# Altium PCB regulated_power_supply_board.PcbDoc
Units mm, origin at the board's own origin, x right, y up, seen from the top; angles counter-clockwise.
Board outline 80 x 50 mm, 2 copper layers (Top Layer, Bottom Layer), stack 1.67 mm thick; 41 components, 23 nets, 135 pads, 0 vias.
Unrouted connection lines stored in the file: 74.
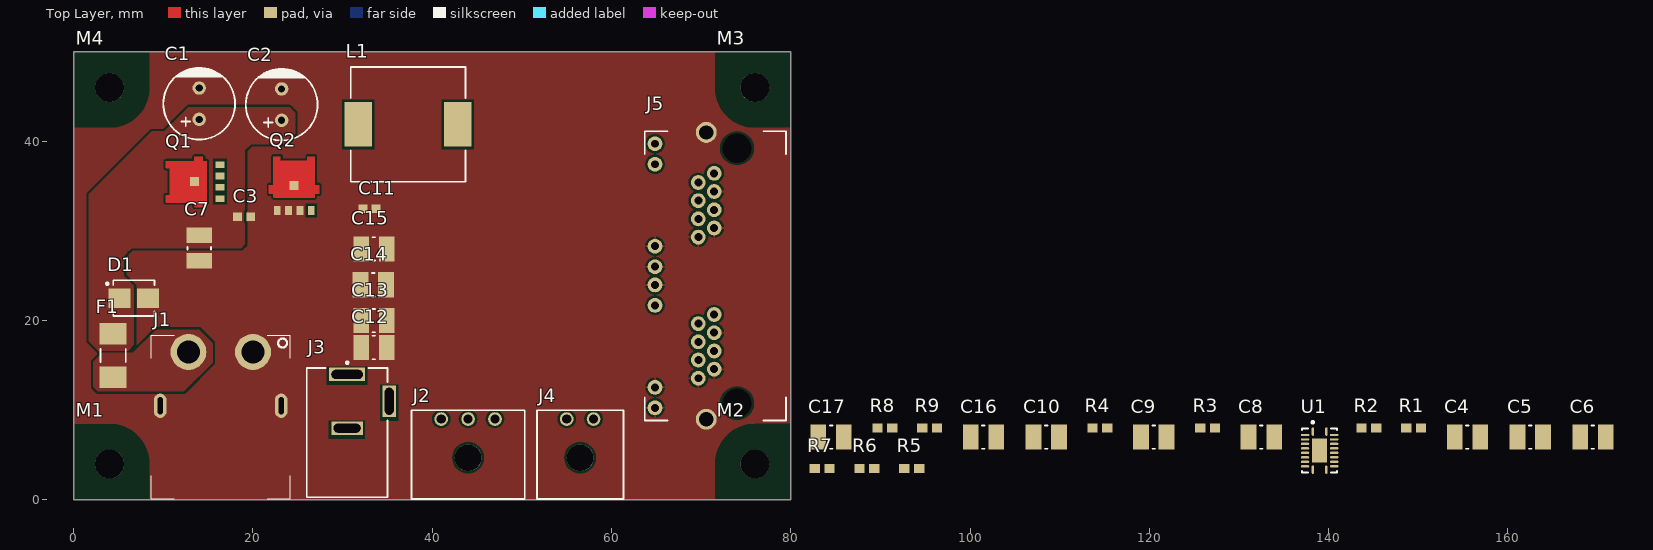
[diagram p0: Top Layer view]
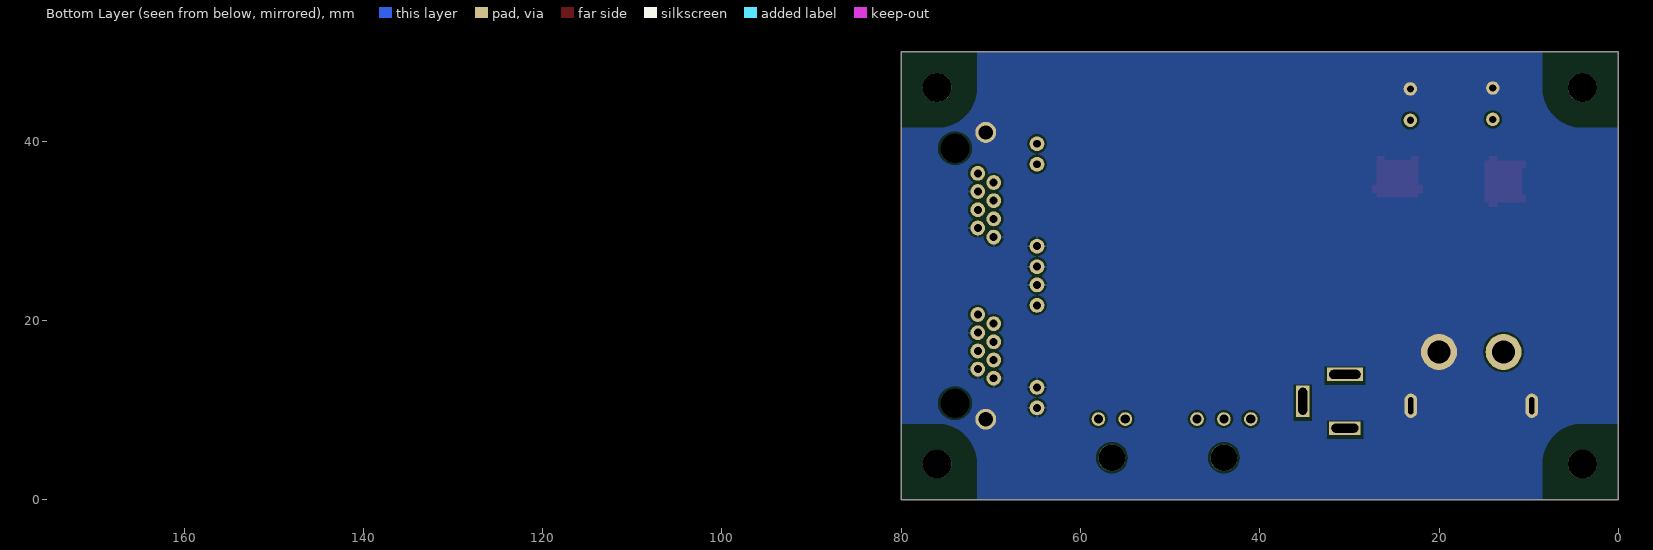
[diagram p1: Bottom Layer view, seen from below]

## Layer stack, top to bottom
Top Solder: solder mask 0.0102, Solder Resist, Dk 3.5
Top Layer: signal copper 0.035
Dielectric 1: dielectric 1.6, FR-4, Dk 4.8
Bottom Layer: signal copper 0.035
Bottom Solder: solder mask 0.0102, Solder Resist, Dk 3.5

## Board outline
0,0 80,0 80,50 0,50

## Design rules (kind name [scope] priority, off if disabled: settings)
Clearance [All] p1: gap=0.254 ignorepadtopadclearanceinfootprint=FALSE except(0: Arc-Hole Track-Hole SMDPad-Hole THPad-Hole Via-Hole Fill-Hole Poly-Hole Region-Hole Text-Hole)
PolygonConnect PolygonConnect_Power [InNetClass('Power')] p1: connectstyle=Direct reliefconductorwidth=0.254 reliefentries=4 polygonreliefangle="90 Angle" airgapwidth=0.254
PolygonConnect PolygonConnect_General [All] p2: connectstyle=Relief reliefconductorwidth=0.254 reliefentries=4 polygonreliefangle="90 Angle" airgapwidth=0.254
RoomDefinition regulated_power_supply_board [InComponentClass('regulated_power_supply_board')] p1 off: confinementstyle=ConfineIn formatcopy=TRUE lockcomponents=FALSE outline 81,2 99.5,2 99.5,13.5 81,13.5
RoutingVias [All] p1: holewidth=0.711 width=1.27 viastyle="Through Hole" minholewidth=0.711 minwidth=1.27 maxholewidth=0.711 maxwidth=1.27
SolderMaskExpansion [All] p1: expansion=0.102 istentingtop=FALSE
Width [All] p1: maxlimit=0.254 minlimit=0.254 preferedwidth=0.254
30 further rules are at their usual default settings.

## Classes and differential pairs
net class Power: PGND SW VIN VIN_UNFUSED VOUT_12
component class regulated_power_supply_board: C1 C2 C3 C4 C5 C6 C7 C8 C9 C10 C12 C13 C14 C15 C16 C17 D1 F1 J1 J4 J5 L1 M1 M2 M3 M4 Q1 Q2 R1 R2 R3 R4 R5 R6 R7 R8 U1

## Components (designator, comment, footprint, x,y, rotation, side; value= is the part's Value field where it differs from the comment)
C1 "100uF" CPOL_8x11_5_THRU 14,44.2 r90 top
C2 "100uF" CPOL_8x11_5_THRU 23.2,44.1 r90 top
C3 "=Partnumber" CAPC1608X09N 19,31.6 r0 top
C4 "=Partnumber" "C1210 (3225M)" 155.5,7 r0 top
C5 "=Partnumber" "C1210 (3225M)" 162.5,7 r0 top
C6 "=Partnumber" "C1210 (3225M)" 169.5,7 r0 top
C7 "=Partnumber" "C1210 (3225M)" 14,28.1 r90 top
C8 "=Partnumber" "C1210 (3225M)" 132.5,7 r0 top
C9 "=Partnumber" "C1210 (3225M)" 120.5,7 r0 top
C10 "=Partnumber" "C1210 (3225M)" 108.5,7 r0 top
C11 "=Partnumber" CAPC1608X09N 33,32.5 r180 top
C12 "=Partnumber" "C1210 (3225M)" 33.5,17 r0 top
C13 "=Partnumber" "C1210 (3225M)" 33.5,20 r0 top
C14 "=Partnumber" "C1210 (3225M)" 33.425,24 r0 top
C15 "=Partnumber" "C1210 (3225M)" 33.5,28 r0 top
C16 "=Partnumber" "C1210 (3225M)" 101.5,7 r0 top
C17 "=Partnumber" "C1210 (3225M)" 84.5,7 r0 top
D1 "=Partnumber" SMB 6.7,22.5 r0 top
F1 "=Partnumber" Littelfuse_157 4.4,16.1 r90 top
J1 "XT60PW-M" XT60PW-M 16.4,10.5 r180 top
J2 "=Partnumber" 43650-030X 44,4.7 r0 top
J3 "PJ-002A" CUI-PJ-002A_V 30.5,11 r270 top
J4 "=Partnumber" 43650-020X 56.5,4.7 r0 top
J5 "RJHSE-X381-02" RJHSE-X38X-02 74,25 r90 top locked
L1 "100uH" SRP1265A 37.3,41.9 r0 top
M1 "Component_1" MOUNT_HOLE_3.2 0,0 r0 top
M2 "Component_1" MOUNT_HOLE_3.2 80,0 r90 top
M3 "Component_1" MOUNT_HOLE_3.2 80,50 r180 top
M4 "Component_1" MOUNT_HOLE_3.2 0,50 r270 top
Q1 "MOSFET-N" "DFN-5 (SO-8FL)" 13.5,35.5 r90 top
Q2 "MOSFET-N" "DFN-5 (SO-8FL)" 24.6,35.1 r0 top
R1 "=Partnumber" CR0603 149.5,8 r0 top
R2 "=Partnumber" CR0603 144.5,8 r0 top
R3 "=Partnumber" CR0603 126.5,8 r0 top
R4 "=Partnumber" CR0603 114.5,8 r0 top
R5 "=Partnumber" CR0603 93.5,3.5 r0 top
R6 "=Partnumber" CR0603 88.5,3.5 r0 top
R7 "=Partnumber" CR0603 83.5,3.5 r0 top
R8 "=Partnumber" CR0603 90.5,8 r0 top
R9 "=Partnumber" CR0603 95.5,8 r0 top
U1 "=Partnumber" RGY0020B_TI_N 139,5.5 r0 top

## Footprints (in the part's own frame and the unit in brackets; to place one, negate y for a bottom-side part, rotate by r counter-clockwise, add the part's x,y. Pads: shape width x height; smd on the part's side, far side on the other; paste and mask are expansions set on the pad)
43650-020X [mm] "Molex Micro-Fit 3.0, 2POS, R/A w/Pegs, Single row"
  round 1.524 hole 1.02: 1(1.5,4.32) 2(-1.5,4.32)
  round 3 hole 3 unplated paste+0 mask+0: 3(0,0)
  silkscreen extent -4.82,-4.6 4.82,5.3, body extent -4.83,-4.6 4.83,5.3, height 5.57
43650-030X [mm] "Molex Micro-Fit 3.0, 2POS, R/A w/Pegs, Single row"
  round 1.524 hole 1.02: 1(3,4.32) 2(0,4.32) 3(-3,4.32)
  round 3 hole 3 unplated paste+0 mask+0: 4(0,0)
  silkscreen extent -6.32,-4.6 6.32,5.3, body extent -6.32,-4.6 6.33,5.3, height 5.57
"C1210 (3225M)" [mm] "Taiyo-Yuden SMD MLCC, Body 3.20x2.50mm, IPC Low Density"
  rect 1.75x2.8 smd: 1(-1.425,0) 2(1.425,0)
  silkscreen extent -0.15,-1.3 0.15,1.3, body extent -1.75,-1.35 1.75,1.35, height 2.7
CAPC1608X09N [mm] "Chip Capacitor, 2-Leads, Body 1.60x0.80mm, IPC Medium Density"
  rect 1x0.95 smd: 1(-0.75,0) 2(0.75,0)
  body extent -0.85,-0.45 0.85,0.45, height 0.9
CPOL_8x11_5_THRU [mm] "Capacitor with polarity, Radial lead, D=5mm, H=11mm, Pitch 5mm, Through-hole"
  round 1.5 hole 0.8: 1(-1.75,0) 2(1.75,0)
  silkscreen extent -4,-4 4,4, body extent -4,-4 4.01,4, height 13.01
CR0603 [mm] "Bourns Chip Resistor, CR Series, 2-Leads, Body 1.60x0.80mm, IPC Low Density"
  rect 1.15x1 smd: 1(-0.825,0) 2(0.825,0)
  body extent -0.85,-0.45 0.85,0.45, height 0.55
CUI-PJ-002A_V [mm] "THD, 3-Leads, Body 14.4x9mm, Height 11mm"
  rect 1.5x4 hole 1 slot 3.5 at 90 deg: 1(-3,0)
  rect 1.5x3.5 hole 1 slot 3 at 90 deg: 2(3,0)
  rect 3.5x1.5 hole 1 slot 3 at 0 deg: 3(0,4.7)
  silkscreen extent -4.42,-4.5 10.7,4.5, body extent -3.7,-4.5 10.7,4.9, height 11
"DFN-5 (SO-8FL)" [mm]
  rect 1x1 smd paste+0 mask+0: D(0,0)
  rect 0.75x1 smd: G(1.905,-2.795) S(-1.905,-2.795) S(-0.635,-2.795) S(0.635,-2.795)
  Top Layer region: -2.286,-1.33 -2.286,-0.905 -2.775,-0.905 -2.775,0 -2.28,0 -2.28,3.2 -1.53,3.2 -1.53,2.725 1.53,2.725 1.53,3.2 2.28,3.2 2.28,0 2.775,0 2.775,-0.905 2.28,-0.905 2.28,-1.33
  Top Layer lines w0: -2.28,3.2 -2.28,0 -2.775,0 -2.775,-0.905 -2.286,-0.905 -2.286,-1.33 2.28,-1.33 2.28,-0.905 2.775,-0.905 2.775,0 2.28,0 2.28,3.2 1.53,3.2 1.53,2.725 -1.53,2.725 -1.53,3.2 -2.28,3.2
  body extent -2.57,-3.07 2.58,3.08, height 1
Littelfuse_157 [mm] "Surface ount Fuse Assy, 2-Leads, Body 6.10x2.69mm, IPC Medium Density"
  rect 2.4x3 smd: 1(-2.43,0) 2(2.43,0)
  silkscreen extent -0.75,-1.4 0.75,1.4, body extent -3.35,-1.93 3.35,1.93, height 4
MOUNT_HOLE_3.2 [mm] "mouting hole for corners, D=3.20mm"
  round 3.2 hole 3.2 paste+0 mask+0: 1(4,4)
  Top Layer pour cut-out: 0,0 0,8.5 4,8.5 5.722,8.157 7.182,7.182 8.157,5.722 8.5,4 8.5,4 8.5,0
  Top Layer pour cut-out: 0,0
  Bottom Layer pour cut-out: 0,0 0,8.5 4,8.5 6.25,7.897 7.897,6.25 8.5,4 8.5,4 8.5,0
  body extent 1.25,1.25 6.75,6.75, height 3
RGY0020B_TI_N [mm] "QFN, 20-Leads, Body 3.50x4.50mm, Pitch 1.50mm/0.50mm, Thermal Pad 1.70x2.70mm, IPC Medium Density"
  oval 0.25x0.95 smd: 1(-0.75,2.125) 10(-0.75,-2.125) 11(0.75,-2.125) 20(0.75,2.125)
  oval 0.95x0.25 smd: 2(-1.625,1.75) 3(-1.625,1.25) 4(-1.625,0.75) 5(-1.625,0.25) 6(-1.625,-0.25) 7(-1.625,-0.75) 8(-1.625,-1.25) 9(-1.625,-1.75) 12(1.625,-1.75) 13(1.625,-1.25) 14(1.625,-0.75) 15(1.625,-0.25) 16(1.625,0.25) 17(1.625,0.75) 18(1.625,1.25) 19(1.625,1.75)
  rect 1.7x2.7 smd: 21(0,0)
  silkscreen extent -1.95,-2.45 1.95,3.27, body extent -1.8,-2.3 1.8,2.3, height 1
RJHSE-X38X-02 [mil]
  round 65 hole 35: 1-1(450,100) 1-2(410,170) 1-3(370,100) 1-4(330,170) 1-5(290,100) 1-6(250,170) 1-7(210,100) 1-8(170,170) 1-9(580,360) 1-10(490,360) 1-11(130,360) 1-12(40,360) 2-1(-170,100) 2-2(-210,170) 2-3(-250,100) 2-4(-290,170) 2-5(-330,100) 2-6(-370,170) 2-7(-410,100) 2-8(-450,170) 2-9(-40,360) 2-10(-130,360) 2-11(-490,360) 2-12(-580,360)
  round 60 hole 128 unplated: *(-560,0) *(560,0)
  round 92 hole 62: S1(630,135) S2(-630,135)
  silkscreen extent -635,-215 635,405, body extent -698,-231 698,404, height 593
SMB [mm] "Molded Diode, 2-Leads, Body 4.31x3.62mm, IPC Medium Density"
  rect 2.45x2.15 smd: 1(-1.575,0) 2(1.575,0)
  silkscreen extent -3.07,-2 2.3,2, body extent -2.5,-1.97 2.5,1.97, height 2.5
SRP1265A [mm] "Molded Inductor, 2-Leads, Body 12.50x12.50mm, IPC Medium Density"
  rect 3.1x5 smd: 1(-5.55,0) 2(5.55,0)
  silkscreen extent -6.4,-6.4 6.4,6.4, body extent -6.74,-6.3 6.74,6.3, height 6.31
XT60PW-M [mm] "XT60, 2 pins, Male, PCB mount, TH, R/A"
  round 4 hole 2.6: N(-3.6,-6) P(3.6,-6)
  oval 1.4x2.7 hole 1.9 slot 0.6 at 0 deg: T1(6.75,0) T2(-6.75,0)
  silkscreen extent -7.75,-7.85 7.75,10.35, body extent -7.75,-7.85 7.75,10.35, height 8.4

## Part data
C1 C2: library part CPOL
C3 C4 C5 C6 C7 C8 C9 C10 C11 C16 C17: library part C
C12 C13 C14 C15: library part C, "Ceramic capacitor 1210 X7R 50V 4.7uF", Capacitance=4.7uF, Case Code (Imperial)=1210, Case Code (Metric)=3225, Dielectric=X7R, Manufacturer="Taiyo Yuden", Manufacturer Part Number=UMK325B7475MM-T, Max Operating Temperature=125°C, Min Operating Temperature=-55°C, Package Quantity=500, Tolerance=20%, Voltage=50V, Case/Package=1210, Category="Ceramic Capacitors", ComponentLink1Description=https://datasheet.ciiva.com/2990/umk325b7475mm-t-ss-2990073.pdf?src-supplier=Avnet, ComponentLink1URL=https://datasheet.ciiva.com/2990/umk325b7475mm-t-ss-2990073.pdf?src-supplier=Avnet, ComponentLink2Description=https://datasheet.ciiva.com/141/umk325b7475mm-t-ss-141867.pdf?src-supplier=Digi-Key, ComponentLink2URL=https://datasheet.ciiva.com/141/umk325b7475mm-t-ss-141867.pdf?src-supplier=Digi-Key, ComponentLink3Description=https://datasheet.ciiva.com/5441/mlcc-all-e-541559-5441759.pdf?src-supplier=Mouser, ComponentLink3URL=https://datasheet.ciiva.com/5441/mlcc-all-e-541559-5441759.pdf?src-supplier=Mouser, Depth=2.5mm, Halogen Free="Halogen Free", Height=2.5mm, Lead Free="Lead Free", Length=3.2mm, Mount="Surface Mount", Packaging="Tape and Reel", Pricing 1="500=0.11860, 1000=0.10876, 2000=0.10029, 3000=0.09316, 5000=0.08688 (USD)", Radiation Hardening=No, REACH SVHC=Unknown, RoHS=Yes, Supplier 1=Avnet, Supplier Part Number 1=UMK325B7475MM-T, Termination=SMD/SMT, Thickness=0.106inch, Voltage Rating=50V, Voltage Rating (DC)=50V, Width=0.098inch
D1: library part TVS
F1: library part Littelfuse_157, "FUSE CLIP W/ 10A FUSE, FAST ACTING - More Details", Case/Package=SMD/SMT, Current Rating=10A, DC Cold Resistance=5.8mR, Manufacturer=Littelfuse, Manufacturer Part Number=0157010.DR, Max Operating Temperature=125°C, Min Operating Temperature=-55°C, Package Quantity=1500, Supplier Part Number 1=F2973CT-ND, Voltage Rating (AC)=125V, Approvals=cULus,PSE, Category=Fuses, ComponentLink1Description=https://datasheet.ciiva.com/1221/682285-1221410.pdf?src-supplier=Newark, ComponentLink1URL=https://datasheet.ciiva.com/1221/682285-1221410.pdf?src-supplier=Newark, ComponentLink2Description=https://datasheet.ciiva.com/300/littelfuse-fuse-157-300246.pdf?src-supplier=Digi-Key, ComponentLink2URL=https://datasheet.ciiva.com/300/littelfuse-fuse-157-300246.pdf?src-supplier=Digi-Key, ComponentLink3Description=https://datasheet.ciiva.com/300/littelfuse-fuse-157-300247.pdf?src-supplier=Digi-Key, ComponentLink3URL=https://datasheet.ciiva.com/300/littelfuse-fuse-157-300247.pdf?src-supplier=Digi-Key, ComponentLink4Description=https://datasheet.ciiva.com/1268/479491-1268801.pdf?src-supplier=Element14, ComponentLink4URL=https://datasheet.ciiva.com/1268/479491-1268801.pdf?src-supplier=Element14, ComponentLink5Description=https://datasheet.ciiva.com/1268/littelfuse-fuse-157-1268995.pdf?src-supplier=Element14, ComponentLink5URL=https://datasheet.ciiva.com/1268/littelfuse-fuse-157-1268995.pdf?src-supplier=Element14, ComponentLink6Description=https://datasheet.ciiva.com/1272/479491-1272582.pdf?src-supplier=Farnell, ComponentLink6URL=https://datasheet.ciiva.com/1272/479491-1272582.pdf?src-supplier=Farnell, ComponentLink7Description=https://datasheet.ciiva.com/300/littelfuse-fuse-157-300248.pdf?src-supplier=Digi-Key, ComponentLink7URL=https://datasheet.ciiva.com/300/littelfuse-fuse-157-300248.pdf?src-supplier=Digi-Key, ComponentLink8Description=https://datasheet.ciiva.com/26845/getdatasheetpartid-343817-26845370.pdf?src-supplier=Verical, ComponentLink8URL=https://datasheet.ciiva.com/26845/getdatasheetpartid-343817-26845370.pdf?src-supplier=Verical, ComponentLink9Description=https://datasheet.ciiva.com/1272/littelfuse-fuse-157-1272878.pdf?src-supplier=Farnell, ComponentLink9URL=https://datasheet.ciiva.com/1272/littelfuse-fuse-157-1272878.pdf?src-supplier=Farnell, Depth=3.7mm, Fuse Current=10A, Fuse Type="Board Mount (Cartridge Style Excluded)", Height=0.154inch, Housing Material=Ceramic, Lead Free="Lead Free", Length=6.5mm, Mount="Surface Mount,Holder", Number of Pins=2, Packaging="Tape and Reel", Pricing 1="1=2.73000, 5=2.60000, 10=2.47000, 50=1.99360, 100=1.69030, 250=1.64692, 500=1.38688 (USD)", Radiation Hardening=No, REACH SVHC="No SVHC", Resistance=5.8mR, RoHS=Yes, Stock 1=8274, Supplier 1=Digi-Key, Voltage Rating (DC)=125V, Width=0.146inch
J1: "XT60, Male, THT, R/A"
J2: library part 43650-030X, "Header, Micro-Fit 3.0 , Molex, R/A, 2 POS, 3mm"
J3: library part CMP-2000-06895-1, "Through Hole Right Angle DC Power Jack, 2.5 A, 2 mm Center Pin, 3 Position, -25 to 85 degC, RoHS, Bulk", Color=Black, Current Rating=2.5A, Flammability Rating=UL94V-0, Insulation Resistance=50MOhms, Manufacturer=CUIInc., Manufacturer Part Number=PJ-002B, Max Operating Temperature=85°C, Min Operating Temperature=-25°C, Operating Temperature Range=-25Cto+85C, Package Description="3-Pin Through Hole Device, Body 14.4 x 9 mm, Height 11 mm", Package Quantity=500, Supplier Part Number 1=CP-002B-ND, Voltage Rating=24V, Brand=CUI, Category=Connectors, ComponentLink1Description=http://www.mouser.com/ds/2/670/pj-002b-515833.pdf?src-supplier=Mouser, ComponentLink1URL=http://www.mouser.com/ds/2/670/pj-002b-515833.pdf?src-supplier=Mouser, ComponentLink2Description=http://www.cui.com/Product/Resource/FuturePDF/PJ-002B.pdf?src-supplier=Future+Electronics, ComponentLink2URL=http://www.cui.com/Product/Resource/FuturePDF/PJ-002B.pdf?src-supplier=Future+Electronics, ComponentLink3Description=https://www.cui.com/product/resource/digikeypdf/pj-002b.pdf?src-supplier=Digi-Key, ComponentLink3URL=https://www.cui.com/product/resource/digikeypdf/pj-002b.pdf?src-supplier=Digi-Key, Connector Type=DCPowerJack, Contact Gender=Male, Contact Material=Copper, Contact Plating=Nickel, Datasheet URL=http://www.cui.com/product/resource/pj-002a.pdf, Datasheet Version="Rev. 1.03, 04/2016", Diameter=2.5mm, Factory Pack Quantity=500, Gender=Male, Housing Color=Black, Housing Material=PolybutyleneTerephthalate(PBT), Inside Contact Diameter=2mm, Lead Free="Lead Free", Manufacturer URL=http://www.cui.com/, Mount="Through Hole", Mounting Angle=Right, Mounting Style=ThroughHole, Mounting Technology=ThroughHole, Number of Conductors=2, Orientation=Horizontal, Outside Contact Diameter=6.5mm, Package Reference=PJ-002A, Packaging=Bulk, Pricing 1="1=0.60000, 10=0.55800, 25=0.50240, 50=0.44640, 100=0.42780, 250=0.39060, 500=0.37200, 1000=0.30690, 2500=0.27900 (USD)", Product=Jacks, Product Category=DCPowerConnectors, RoHS=True, Shielding=Unshielded, Stock 1=14399, Supplier 1=Digi-Key, Termination="Through Hole", Termination Style=ThroughHole
J4: library part 43650-020X, "Header, Micro-Fit 3.0 , Molex, R/A, 2 POS, 3mm"
L1: library part L
R1 R2 R3 R4 R5 R6 R7 R8 R9: library part R
U1: library part LM25145

## Nets (pads, with @x,y where several pads share a name; then routed paths per layer and width w, separated by ;. In a path a pad name is that pad's centre, name@x,y a point inside that pad or via, vN(x,y) a via of type N, cw(c..) or ccw(c..) an arc to the next point about the centre after c; other vN are vias at no path point)
AGND: C16.1 R7.2 R8.1 R9.1 U1.6
GND: J5.1-3 J5.1-7 J5.1-8 J5.1-11 J5.1-12 J5.2-3 J5.2-7 J5.2-8 J5.2-9 J5.2-11 J5.2-12 J5.S1 J5.S2
NetC8_1: C8.1 R1.2 U1.20
NetC9_2: C9.2 R3.1 U1.11
NetC10_2: C10.2 R4.2
NetC16_2: C16.2 U1.3
NetJ5_1-1: J5.1-1 J5.2-1
NetJ5_1-2: J5.1-2 J5.2-2
NetJ5_1-4: J5.1-4 J5.1-5 J5.2-4 J5.2-5
NetJ5_1-6: J5.1-6 J5.2-6
NetQ1_G: Q1.G U1.18
NetQ2_G: Q2.G U1.13
NetR2_1: R2.1 R8.2 U1.1
NetR4_1: R4.1 U1.17
NetR5_1: R5.1 R7.1 U1.8
NetR6_1: R6.1 U1.10
NetR9_2: R9.2 U1.2
PGND: C1.2 C2.2 C3.2 C4.1 C5.1 C6.1 C7.1 C8.2 C9.1 C11.2 C12.1 C13.1 C14.1 C15.1 C17.1 D1.2 J1.N J1.T1 J1.T2 J4.1 Q2.S U1.9 U1.12 U1.15 U1.16 U1.21
SW: C10.1 L1.1 Q1.S Q2.D R3.2 U1.19
VCC: C17.2 R5.2 R6.2 U1.14
VIN: C1.1 C2.1 C3.1 C4.2 C5.2 C6.2 C7.2 D1.1 F1.2 Q1.D R1.1 R2.2
VIN_UNFUSED: F1.1 J1.P
VOUT_12: C11.1 C12.2 C13.2 C14.2 C15.2 J4.2 L1.2
pads on no net: J2.1 J2.2 J2.3 J2.4 J3.1 J3.2 J3.3 J4.3 J5.1-9 J5.1-10 J5.2-10 J5.* M1.1 M2.1 M3.1 M4.1 U1.4 U1.5 U1.7

## Polygon pours and split planes (outlines as drawn)
GND on Top Layer "GND_L01_P007" (solid, pour order 7): 0,0 0,50 80,50 80,0
VIN on Top Layer "VIN_L01_P005" (solid, pour order 5): 12.8,43.8 24.1,43.8 24.7,43.2 24.7,40.85 23.78,39.7 19.8,39.7 19.1,39 19.1,28.5 18.7,28.1 6.5,28.1 5.6,27.2 5.6,25 6.7,23.9 6.7,17.3 6,16.6 2.8,16.6 1.7,17.7 1.7,34.1 8.7,41.1 10.1,41.1
VIN_UNFUSED on Top Layer "VIN_UNFUSED" (solid, pour order 2): 12.3,12.1 15.5,15.3 15.5,17.5 14,19 9.2,19 6.6,16.4 3.2,16.4 2.2,15.4 2.2,12.6 2.7,12.1
GND on Bottom Layer "GND" (solid, pour order 4): 0,0 0,50 80,50 80,0